# EAGLE board projekt_radsadobotek (EAGLE 9.6.2)
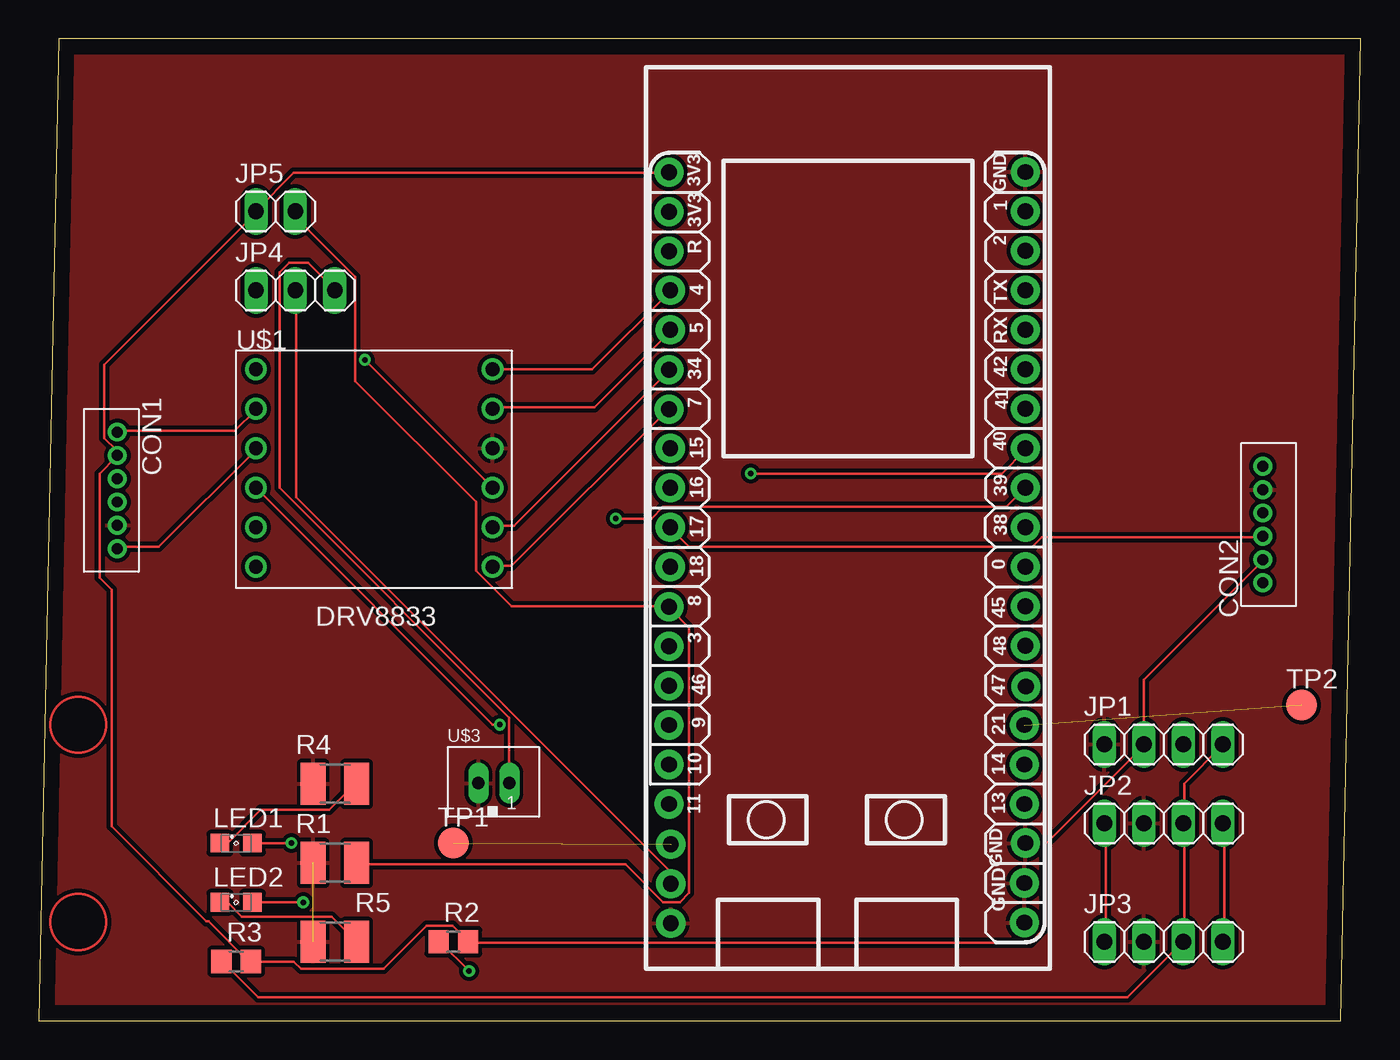
[diagram p0: board, top side]
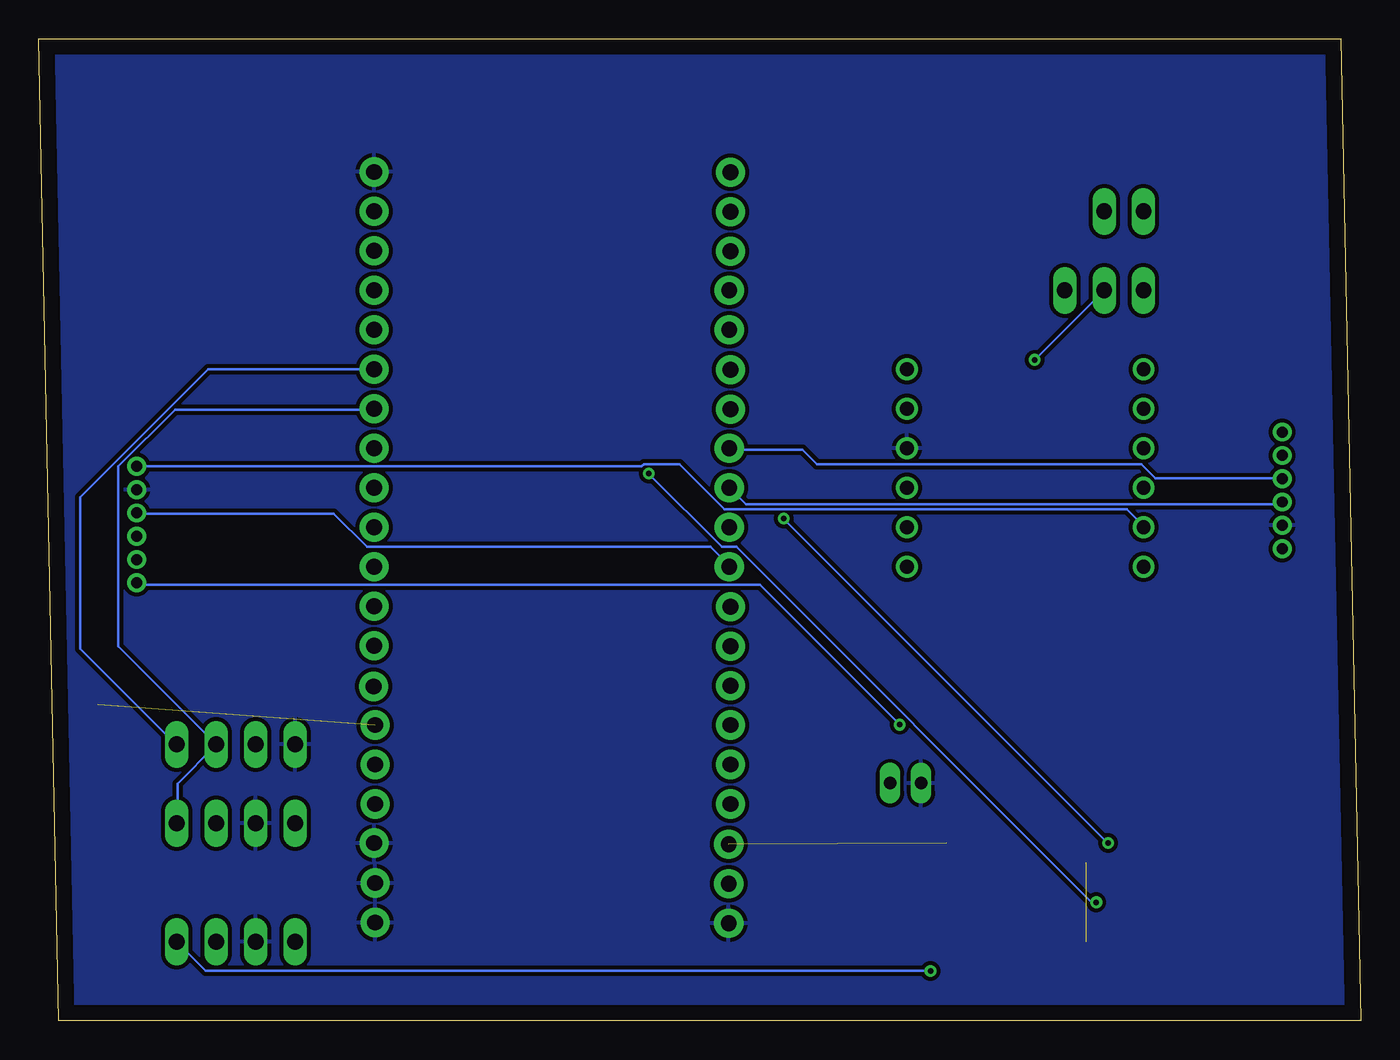
[diagram p1: board, bottom side, seen from below]

Size 85.07 x 63.17 mm. Coordinates in mm from the lower left corner, seen from the top.
Outline: 0,0 83.8,0 85.07,63.17 1.27,63.17 0,0
Copper layers (1*16): Top 0.035mm / dielectric 1.5mm / Bottom 0.035mm
Design rules "default *": minimum track width 12mil, minimum drill 10mm, track to track 10mil, track to pad 10mil, pad to pad 10mil, via to via 10mil, smd to smd 10mil, copper to edge 40mil, drill to drill 6mil, minimum pad ring 10mil, minimum via ring 8mil, stop-mask expansion 4mil, vias tented up to drill 0mil, thermal gap 10mil

## Footprints (pad centres in the part's own frame; a part is rotated, then mirrored left to right if it is on the bottom)
B6B-ZR = drill 0.7: 1 9,-1.3; 2 7.5,-1.3; 3 6,-1.3; 4 4.5,-1.3; 5 3,-1.3; 6 1.5,-1.3
SSFD_LOLIN32_WEMOS_CHINA_W_BATT = drill 1.016 pad 1.88: 0 11.43,-7.62; 1 11.43,15.24; 2 11.43,12.7; 3 -11.51,-12.73; 3V3A -11.51,17.75; 3V3D1 -11.51,15.21; 4 -11.43,10.16; 5 -11.43,7.62; 5V -11.4,-28.02; 6 -11.51,5.05; 7 -11.51,2.51; 8 -11.51,-10.19; 9 -11.51,-17.81; 10 -11.51,-20.35; 11 -11.51,-22.89; 12 -11.4,-25.48; 13 11.35,-22.89; 14 11.35,-20.35; 15 -11.43,0; 16 -11.43,-2.54; 17 -11.43,-5.08; 18 -11.43,-7.62; 21 11.35,-17.81; 38 11.43,-5.08; 39 11.43,-2.54; 40 11.43,0; 41 11.43,2.54; 42 11.43,5.08; 45 11.43,-10.16; 46 -11.51,-15.27; 47 11.46,-15.32; 48 11.43,-12.7; GNDA4 -11.4,-30.56; GNDB 11.43,17.78; GNDC1 11.35,-27.97; GNDD1 11.35,-30.51; GNDE 11.43,-25.4; RESET -11.51,12.67; RX 11.43,7.62; TX 11.43,10.16
1X04 = drill 1.016 long: 1 -3.81,0; 2 -1.27,0; 3 1.27,0; 4 3.81,0
1X03 = drill 1.016 long: 1 -2.54,0; 2 0,0; 3 2.54,0
1X02 = drill 1.016 long: 1 -1.27,0; 2 1.27,0
SML0805 = smd 1.2 x 1.2: A 1.05,0; C -1.05,0
R1210 = smd 1.6 x 2.7: 1 -1.4,0; 2 1.4,0
R0805 = smd 1.3 x 1.5: 1 -0.95,0; 2 0.95,0
TP20R = smd 2 x 2: TP 0,0
POLOLU-DRV8833 = drill 0.9: FAULT -8.89,-10.16; GND 6.35,-2.54; IN1 6.35,-10.16; IN2 6.35,-7.62; IN3 6.35,0; IN4 6.35,2.54; OUT1 -8.89,0; OUT2 -8.89,-2.54; OUT3 -8.89,-5.08; OUT4 -8.89,-7.62; SLEEP -8.89,2.54; VCC 6.35,-5.08
JST_B2B-PH_HEADER = drill 0.8 long: P1 1.075,0.048; P2 -0.925,0.048

## Placement (x,y rotation side)
CON1  B6B-ZR  [B6B-ZR]  6.35,39.37 270 top
CON2  B6B-ZR  [B6B-ZR]  77.47,26.67 90 top
IC1  [SSFD_LOLIN32_WEMOS_CHINA_W_BATT]  52.07,36.83 0 top
JP1  [1X04]  72.39,17.78 0 top
JP2  [1X04]  72.39,12.7 0 top
JP3  [1X04]  72.39,5.08 0 top
JP4  [1X03]  16.51,46.99 0 top
JP5  [1X02]  15.24,52.07 0 top
LED1  [SML0805]  12.7,11.43 0 top
LED2  [SML0805]  12.7,7.62 0 top
R1  10k  [R1210]  19.05,10.16 0 top
R2  2k2  [R0805]  26.67,5.08 0 top
R3  2k2  [R0805]  12.7,3.81 0 top
R4  470  [R1210]  19.05,15.24 0 top
R5  470  [R1210]  19.05,5.08 0 top
TP1  TPTP20R  [TP20R]  26.67,11.43 0 top
TP2  TPTP20R  [TP20R]  81.28,20.32 0 top
U$1  [POLOLU-DRV8833]  22.86,39.37 0 top
U$3  JST-PH_2-PIN_HEADER  [JST_B2B-PH_HEADER]  29.21,15.24 0 top

## Library data of the parts
CON1 CON2 = jst
IC1 = ESP32_S3_v1
JP1-JP5 = pinhead
LED1 LED2 = led
R1-R5 = rcl; SPICEPREFIX: R
TP1 TP2 = testpad
U$1 = Pololu_Driver_DRV8833
U$3 = srg

## Nets
+3V3: CON1.5 CON2.5 IC1.3V3A JP1.2 JP5.1 R2.2 R3.2
E1_A: CON1.4 IC1.15
E1_B: CON1.3 IC1.16
E2_A: CON2.4 IC1.17
E2_B: CON2.3 IC1.18
GND: CON1.2 CON2.2 IC1.GNDA4 IC1.GNDB IC1.GNDC1 IC1.GNDD1 IC1.GNDE JP1.1 JP2.2 JP3.2 R1.1 R4.1 R5.1 U$1.GND U$3.P2
N$1: IC1.4 U$1.IN4
N$2: IC1.5 U$1.IN3
N$3: IC1.6 U$1.IN2
N$4: IC1.7 U$1.IN1
N$5: CON1.1 U$1.OUT2
N$6: CON1.6 U$1.OUT1
N$7: CON2.6 U$1.OUT3
N$8: CON2.1 U$1.OUT4
N$9: JP4.3 U$3.P1
N$10: LED1.C R4.2
N$11: JP2.1 JP3.1
N$12: LED2.C R5.2
N$13: IC1.39 LED1.A
N$14: IC1.40 LED2.A
N$15: IC1.12 TP1.TP
N$16: IC1.21 TP2.TP
PHOTOUPOR: IC1.8 JP5.2 R1.2
SCK: IC1.41 JP1.3 JP2.4 JP3.4 R2.1
SDA: IC1.42 JP1.4 JP2.3 JP3.3 R3.1
VCC: IC1.5V JP4.2 U$1.VCC

## Tracks (layer width: path | path; a pad name or v marks a point on that pad's centre or on a via)
+3V3
  Top 0.152: CON2.5 78.74,29.57 71.12,21.95 JP1.2 71.12,17.68 64.72,11.28 64.72,5.94 63.81,5.03 27.69,5.03 R2.2 27.53,5.18 26.62,6.1 24.94,6.1 22.2,3.35 16.87,3.35 16.41,3.81 R3.2 13.51,3.81 10.92,6.4 10.77,6.4 4.67,12.5 4.67,27.74 3.91,28.5 3.91,35.2 4.98,36.27 CON1.5 4.98,36.42 4.98,36.73 4.22,37.49 4.22,42.21 13.97,51.97 JP5.1 13.97,52.12 16.41,54.56 40.49,54.56 IC1.3V3A
E1_A
  Bottom 0.152: CON1.4 5.13,34.9 13.21,34.9 14.12,35.81 35,35.81 35.92,36.73 40.64,36.73 IC1.15
E1_B
  Bottom 0.152: IC1.16 39.57,33.22 5.13,33.22 CON1.3
E2_A
  Top 0.152: CON2.4 78.74,31.09 64.57,31.09 63.96,30.48 41.86,30.48 40.64,31.7 IC1.17
E2_B
  Bottom 0.152: CON2.3 78.74,32.61 66.09,32.61 63.96,30.48 41.86,30.48 40.64,29.26 IC1.18
GND  (1 unrouted)
  pour Top: -7.62,68.58 96.52,68.58 97.79,69.85 97.79,-6.35 -7.62,-6.35 -8.89,-5.08 -8.89,67.31
  pour Bottom: -10.16,72.39 101.6,72.39 101.6,-11.43 -12.7,-11.43 -12.7,69.85
N$1
  Top 0.152: U$1.IN4 35.61,41.91 40.64,46.94 IC1.4
N$2
  Top 0.152: U$1.IN3 29.21,39.47 35.76,39.47 40.64,44.35 IC1.5
N$3
  Top 0.152: U$1.IN2 29.21,31.85 30.58,31.85 40.49,41.76 IC1.6
N$4
  Top 0.152: U$1.IN1 29.21,29.26 30.43,29.26 40.49,39.32 IC1.7
N$5
  Top 0.152: CON1.1 5.13,30.48 7.72,30.48 13.97,36.73 U$1.OUT2
N$6
  Top 0.152: CON1.6 5.13,37.95 12.6,37.95 13.97,39.32 U$1.OUT1
N$7  (via drill 0.35)
  Top 0.152: v29.67,19.05 29.21,19.05 U$1.OUT3
  Bottom 0.152: v29.67,19.05 38.66,28.04 78.74,28.04 CON2.6
N$8
  Bottom 0.152: CON2.1 78.74,35.66 46.28,35.66 46.13,35.81 43.84,35.81 40.94,32.92 15.04,32.92 13.97,31.85 U$1.OUT4
N$9
  Top 0.152: U$3.P1 30.28,15.39 30.28,19.51 15.49,34.29 15.49,48.16 16.1,48.77 17.32,48.77 19,47.09 JP4.3
N$10
  Top 0.152: LED1.C 12.14,11.43 14.27,13.56 18.69,13.56 20.37,15.24 R4.2
N$11
  Top 0.152: JP3.1 68.68,5.18 68.68,12.65 JP2.1
N$12
  Top 0.152: LED2.C 12.14,7.62 13.06,6.71 18.85,6.71 20.37,5.18 R5.2
N$13  (via drill 0.35)
  Top 0.152: v16.26,11.43 LED1.A | v37.14,32.31 39.42,32.31 40.18,33.07 62.28,33.07 IC1.39
  Bottom 0.152: v37.14,32.31 v16.26,11.43
N$14  (via drill 0.35)
  Top 0.152: v17.02,7.62 LED2.A | v45.82,35.2 61.98,35.2 63.5,36.73 IC1.40
  Bottom 0.152: v17.02,7.62 17.32,7.62 40.18,30.48 41.1,30.48 v45.82,35.2
N$15  (1 unrouted)
N$16  (1 unrouted)
PHOTOUPOR
  Top 0.152: R1.2 20.52,10.06 37.74,10.06 40.18,7.62 41.25,7.62 41.86,8.23 41.86,25.3 40.64,26.52 IC1.8 40.49,26.67 30.43,26.67 28.14,28.96 28.14,33.38 20.37,41.15 20.37,47.85 16.56,51.66 16.56,51.97 JP5.2
SCK  (via drill 0.35)
  Top 0.152: v27.69,3.2 25.86,5.03 R2.1 | JP2.4 76.3,12.65 76.3,5.18 JP3.4
  Bottom 0.152: JP2.4 76.15,12.8 76.15,15.24 73.71,17.68 JP1.3 79.96,24.08 79.96,35.66 76.3,39.32 63.5,39.32 IC1.41 | v27.69,3.2 74.32,3.2 JP3.4
SDA
  Top 0.152: JP1.4 76.15,17.68 73.71,15.24 73.71,12.8 JP2.3 73.71,12.65 73.71,5.18 JP3.3 73.56,5.03 70.05,1.52 14.12,1.52 11.84,3.81 R3.1
  Bottom 0.152: IC1.42 74.17,41.91 82.4,33.68 82.4,23.93 76.3,17.83 JP1.4
VCC  (via drill 0.35)
  Top 0.152: v20.98,42.52 U$1.VCC | IC1.5V 40.64,8.84 40.64,9.6 16.56,33.68 16.56,46.94 JP4.2
  Bottom 0.152: JP4.2 v20.98,42.52
(copper drawn outside any net)
  shapes: Top circle x2